# Altium PCB CuC_PCB.PcbDoc (part 4 of 4)
Units mm, origin at the board's own origin, x right, y up, seen from the top; angles counter-clockwise.
Board outline 203.71 x 204.22 mm, 2 copper layers (Top Layer, Bottom Layer); 421 components, 374 nets, 1366 pads, 155 vias.
Unrouted connection lines stored in the file: 2.
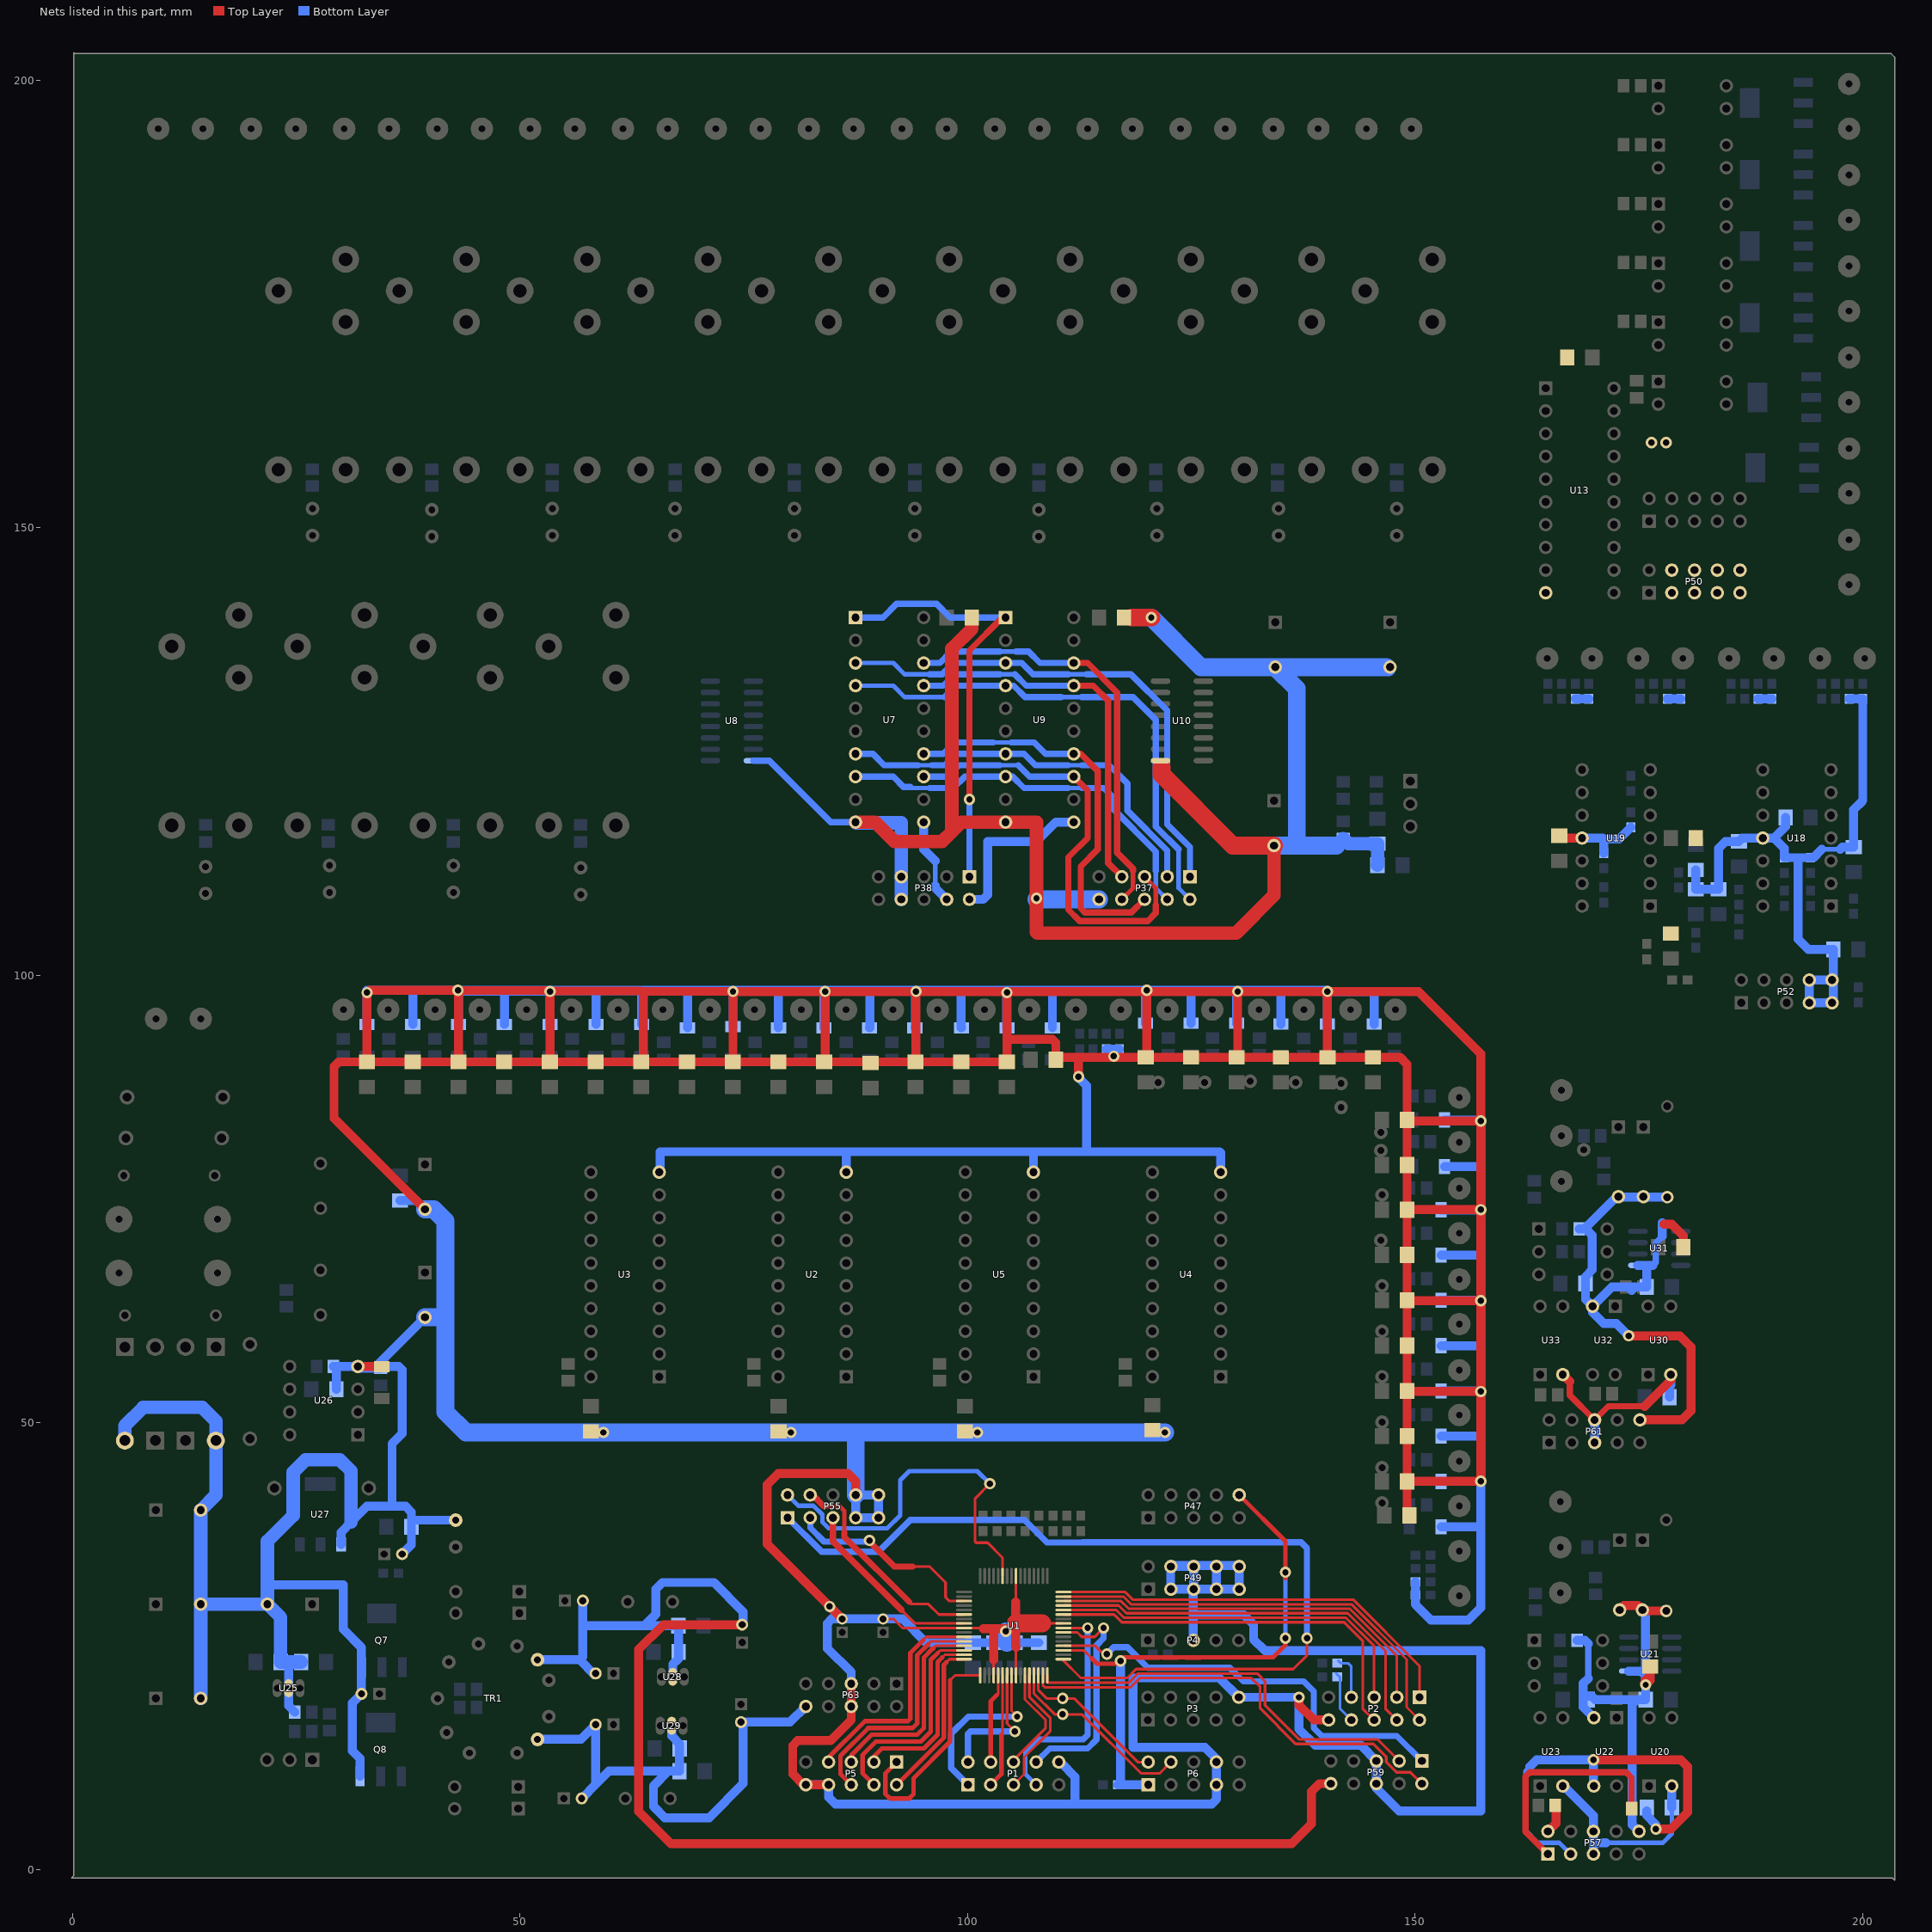
[diagram p4: the nets of this part, all layers, seen from the top]

## Via types
v1: diameter 1.27, hole 0.711, Top Layer to Bottom Layer, 155 vias

## Nets (pads, with @x,y where several pads share a name; then routed paths per layer and width w, separated by ;. In a path a pad name is that pad's centre, name@x,y a point inside that pad or via, vN(x,y) a via of type N, cw(c..) or ccw(c..) an arc to the next point about the centre after c; other vN are vias at no path point) (continued)
O1_CLK: P38.2 U9.11 | length 18.7
  Bottom Layer w1: P38.2@100.203,108.458 101.727,108.458 102.235,108.966 102.235,114.935 107.696,114.935 109.855,117.094 U9.11@111.86,117.094
O2_CLK: P38.4 U7.11 | length 9.7
  Bottom Layer w0.5: 96.393,109.982 96.393,112.776
  Bottom Layer w1: U7.11@95.096,117.094 95.096,114.073 96.393,112.776 ; 96.393,109.982 96.393,109.728 P38.4@97.663,108.458
O_DATA0: P37.1 U7.3 U9.3 | length 57.7
  Bottom Layer w0.5: U7.3@87.476,134.874 91.694,134.874 92.964,133.604 95.74,133.604 ; 111.215,133.604 113.284,133.604
  Bottom Layer w0.7: 95.74,133.604 97.155,133.604 98.425,134.874 U9.3@104.24,134.874 106.045,134.874 107.315,133.604 111.215,133.604 ; 113.284,133.604 118.254,133.604 122.301,129.557 122.301,116.84 124.841,114.3 P37.1@124.841,110.998
O_DATA1: P37.2 U7.4 U9.4 | length 57.8
  Bottom Layer w0.5: U7.4@87.476,132.334 91.694,132.334 92.964,131.064 97.409,131.064 ; 110.49,131.064 112.776,131.064 ; 123.571,114.046 123.571,109.728 P37.2@124.841,108.458
  Bottom Layer w0.7: 97.409,131.064 98.679,132.334 U9.4@104.24,132.334 105.156,132.334 106.426,131.064 110.49,131.064 ; 112.776,131.064 118.491,131.064 121.031,128.524 121.031,116.586 123.571,114.046
O_DATA2: P37.3 U7.7 U9.7 | length 45.1
  Bottom Layer w0.5: 94.451,123.444 96.012,123.444 ; 111.215,123.444 112.776,123.444
  Bottom Layer w0.7: U7.7@87.476,124.714 89.408,124.714 90.678,123.444 94.451,123.444 ; 96.012,123.444 97.409,123.444 98.679,124.714 U9.7@104.24,124.714 106.299,124.714 107.569,123.444 111.215,123.444 ; 112.776,123.444 115.824,123.444 117.856,121.412 117.856,118.364 122.301,113.919 P37.3@122.301,110.998
O_DATA3: P37.4 U7.8 U9.8 | length 44.7
  Bottom Layer w0.5: 93.599,121.031 93.726,120.904 95.74,120.904 ; 111.215,120.904 112.776,120.904 ; 121.031,111.643 121.031,109.728 P37.4@122.301,108.458
  Bottom Layer w0.7: U7.8@87.476,122.174 91.694,122.174 92.837,121.031 93.599,121.031 ; 95.74,120.904 98.425,120.904 99.695,122.174 U9.8@104.24,122.174 105.029,122.174 106.299,120.904 111.215,120.904 ; 112.776,120.904 115.189,120.904 116.267,119.826 116.267,118.556 121.031,113.792 121.031,111.643
O_DATA4: P37.5 U7.13 U9.13 | length 49.5
  Top Layer w0.5: P37.5@119.761,110.998 119.761,110.966 121.031,109.696 121.031,107.813
  Top Layer w0.7: U9.13@111.86,122.174 113.411,120.623 113.411,115.316 111.252,113.157 111.252,107.315 112.522,106.045 120.142,106.045 121.031,106.934 121.031,107.813
  Bottom Layer w0.5: 103.595,123.444 105.664,123.444
  Bottom Layer w0.7: U7.13@95.096,122.174 97.79,122.174 99.06,123.444 103.595,123.444 ; 105.664,123.444 106.934,122.174 U9.13@111.86,122.174
O_DATA5: P37.6 U7.14 U9.14 | length 45.4
  Top Layer w0.7: U9.14@111.86,124.714 112.649,124.714 114.554,122.809 114.554,114.046 112.649,112.141 112.649,107.442 113.092,106.999 118.302,106.999 P37.6@119.761,108.458
  Bottom Layer w0.5: 102.87,125.984 104.884,125.984
  Bottom Layer w0.7: U7.14@95.096,124.714 97.282,124.714 98.552,125.984 102.87,125.984 ; 104.884,125.984 107.442,125.984 108.712,124.714 U9.14@111.86,124.714
O_DATA6: P37.7 U7.17 U9.17 | length 42.7
  Top Layer w0.7: U9.17@111.86,132.334 114.046,132.334 115.697,130.683 115.697,112.522 P37.7@117.221,110.998
  Bottom Layer w0.5: 103.595,133.604 105.283,133.604
  Bottom Layer w0.7: U7.17@95.096,132.334 97.282,132.334 98.552,133.604 103.595,133.604 ; 105.283,133.604 106.553,132.334 U9.17@111.86,132.334
O_DATA7: P37.8 U7.18 U9.18 | length 48.4
  Top Layer w0.5: P37.8@117.221,108.458 118.491,109.728 118.491,111.643
  Top Layer w0.7: U9.18@111.86,134.874 113.411,134.874 116.713,131.572 116.713,113.665 118.491,111.887 118.491,111.643
  Bottom Layer w0.5: 103.595,136.144 105.41,136.144
  Bottom Layer w0.7: U7.18@95.096,134.874 96.901,134.874 98.171,136.144 103.595,136.144 ; 105.41,136.144 106.807,136.144 108.077,134.874 U9.18@111.86,134.874
O_ENABLE: P38.1 U7.1 U9.1 | length 48.9
  Top Layer w0.7: v1(100.203,119.634) 100.203,136.271 103.886,139.954 U9.1@104.24,139.954
  Bottom Layer w0.7: U7.1@87.476,139.954 90.551,139.954 92.075,141.478 96.52,141.478 98.044,139.954 U9.1@104.24,139.954 ; P38.1@100.203,110.998 v1(100.203,119.634)
OUTPUT1_CLK: P6.2 U1.30 | length 17.5
  Top Layer w0.3: U1.30@107.906,21.755 107.906,20.11 108.839,19.177 110.363,19.177 110.617,18.923 v1@110.744,18.923 ; v1(110.617,19.177) 111.887,19.177 118.999,12.065 P6.2@120.184,12.065
OUTPUT2_CLK: P6.4 U1.29 | length 21.7
  Top Layer w0.3: U1.29@107.406,21.755 107.406,19.721 109.728,17.399 110.363,17.399 v1@110.617,17.145 ; v1(110.617,17.399) 112.776,17.399 119.38,10.795 121.454,10.795 P6.4@122.724,12.065
OUTPUT_ENABLE: P6.1 P47.10 R6.1 U1.35 | length 64.1
  Top Layer w0.3: U1.35@110.706,24.555 112.96,24.555 113.842,23.672
  Top Layer w0.5: 113.842,23.672 114.47,23.045 116.771,23.045 117.497,23.771 118.899,23.771 118.916,23.754 121.368,23.754 121.377,23.763 121.886,23.763 121.895,23.754 123.469,23.754 123.478,23.763 124.426,23.763 124.435,23.754 126.009,23.754 126.026,23.771 134.134,23.771 135.509,25.146 v1(135.509,25.908) ; P47.10@130.344,41.91 135.509,36.745 135.509,32.639 v1(135.509,33.274)
  Bottom Layer w0.5: v1@135.509,25.654 v1(135.509,33.274)
  Bottom Layer w1: v1(117.094,23.368) 117.094,9.818 R6.1@116.801,9.525 P6.1@120.184,9.525
PWM0: P55.1 U1.33 | length 103.6
  Top Layer w0.3: U1.33@110.706,23.555 110.706,23.406 112.649,21.463 117.839,21.463 118.83,22.454 136.373,22.454 137.922,24.003 v1@137.922,25.654
  Bottom Layer w0.7: P55.1@79.883,39.37 83.693,35.56 90.043,35.56 93.599,39.116 106.352,39.116 108.862,36.606 112.845,36.606 112.849,36.61 137.253,36.61 137.922,35.941 v1@137.922,25.654
  other v1: 137.922,25.908
PWM1: P55.2 U1.59 | length 43.2
  Top Layer w0.3: v1@102.489,43.18 100.838,41.529 100.838,36.683 100.945,36.576 102.235,36.576 103.906,34.905 U1.59@103.906,32.855
  Bottom Layer w0.5: P55.2@79.883,41.91 81.083,40.71 82.78,40.71 83.763,39.727 83.763,38.873 84.466,38.17 91.002,38.17 92.456,39.624 92.456,43.561 93.472,44.577 101.084,44.577 v1(102.489,43.172)
PWM2: P55.3 U1.3 | length 23.3
  Top Layer w0.3: 93.853,33.909 95.758,33.909 97.536,32.131 97.536,30.48 97.961,30.055 U1.3@99.606,30.055
  Top Layer w0.7: v1(89.027,36.83) 88.9,36.83 91.821,33.909 93.853,33.909
  Bottom Layer w0.7: P55.3@82.423,39.37 82.423,38.227 83.947,36.703 88.773,36.703 88.773,36.957 88.9,36.83 v1(89.027,36.83)
PWM3: P55.4 U1.6 | length 24.4
  Top Layer w0.3: 93.472,29.972 93.726,29.718 95.631,29.718 96.794,28.555 U1.6@99.606,28.555
  Top Layer w0.5: 83.947,40.64 85.725,40.64 86.233,40.132 86.233,37.719
  Top Layer w0.7: P55.4@82.55,42.037 83.947,40.64 ; 86.233,37.719 86.233,37.211 93.472,29.972
PWM4: P55.5 U1.8 | length 21.1
  Top Layer w0.3: 92.583,29.083 94.111,27.555 U1.8@99.606,27.555
  Top Layer w0.7: P55.5@84.963,39.37 84.963,36.703 92.583,29.083
RA0: P1.1 U1.24 | length 19.5
  Top Layer w0.3: U1.24@104.906,21.755 104.906,17.776 v1(105.537,17.145)
  Bottom Layer w0.7: P1.1@100.034,9.525 98.171,11.388 98.171,15.24 100.076,17.145 v1(105.537,17.145)
RA1: P1.2 U1.23 | length 15.1
  Top Layer w0.3: U1.23@104.406,21.755 104.406,16.371 v1(105.283,15.494)
  Bottom Layer w0.7: P1.2@100.034,12.065 100.034,15.198 100.33,15.494 v1(105.283,15.494)
RA2: P1.3 U1.22 | length 12.7
  Top Layer w0.3: 103.906,15.098 U1.22@103.906,21.755
  Top Layer w0.5: P1.3@102.574,9.525 103.774,10.725 103.774,15.098
RA3: P1.4 U1.21 | length 10
  Top Layer w0.3: 103.251,19.558 103.406,19.713 U1.21@103.406,21.755
  Top Layer w0.5: P1.4@102.574,12.065 102.574,18.881 103.251,19.558
RA4: P1.5 U1.28 | length 14.9
  Top Layer w0.3: P1.5@105.114,9.525 106.299,10.71 106.299,12.573 109.22,15.494 109.22,17.018 106.906,19.332 U1.28@106.906,21.755
RA5: P1.6 U1.27 | length 12.1
  Top Layer w0.3: P1.6@105.114,12.065 105.114,12.277 108.72,15.883 108.72,16.756 106.406,19.07 U1.27@106.406,21.755
RA6: P1.7 U1.40 | length 26
  Top Layer w0.3: U1.40@110.706,27.055 112.772,27.055 v1@112.776,27.051
  Bottom Layer w0.5: P1.7@107.654,9.525 106.454,10.725 106.454,13.236 107.823,14.605
  Bottom Layer w0.7: 107.823,14.605 112.903,14.605 113.411,15.113 v1(113.411,27.051)
RA7: P1.8 U1.39 | length 25.7
  Top Layer w0.3: U1.39@110.706,26.555 112.256,26.555 112.756,26.055 114.193,26.055 v1(115.189,27.051)
  Bottom Layer w0.7: P1.8@107.654,12.065 109.178,13.589 113.411,13.589 114.385,14.563 114.385,25.104 115.189,25.908 v1(115.189,27.051)
RB0: P2.1 U1.48 | length 46.7
  Top Layer w0.3: U1.48@110.706,31.055 117.607,31.055 118.436,30.226 143.07,30.226 150.495,22.801 P2.1@150.495,19.304
RB1: P2.2 U1.47 | length 48.6
  Top Layer w0.3: U1.47@110.706,30.555 117.4,30.555 118.261,29.694 142.895,29.694 149.055,23.534 149.055,18.204 P2.2@150.495,16.764
RB2: P2.3 U1.46 | length 44.4
  Top Layer w0.3: U1.46@110.706,30.055 117.138,30.055 117.999,29.194 142.688,29.194 147.955,23.927 P2.3@147.955,19.304
RB3: P2.4 U1.45 | length 46.3
  Top Layer w0.3: U1.45@110.706,29.555 116.876,29.555 117.737,28.694 142.481,28.694 146.685,24.49 146.685,18.034 P2.4@147.955,16.764
RB4: P2.5 U1.44 | length 42.1
  Top Layer w0.3: U1.44@110.706,29.055 116.614,29.055 117.475,28.194 142.274,28.194 145.415,25.053 P2.5@145.415,19.304
RB5: P2.6 U1.43 | length 44
  Top Layer w0.3: U1.43@110.706,28.555 116.352,28.555 117.221,27.686 142.074,27.686 144.145,25.615 144.145,18.034 P2.6@145.415,16.764
RB6: P2.7 R1.1 | length 5.1
  Bottom Layer w0.3: R1.1@141.439,23.368 141.693,23.114 142.494,23.114 142.875,22.733 P2.7@142.875,19.304
RB7: P2.8 R2.1 | length 5.9
  Bottom Layer w0.3: R2.1@141.185,21.971 141.605,21.551 141.605,18.034 P2.8@142.875,16.764
RF1: P5.1 U1.17 | length 25.6
  Top Layer w0.3: 98.044,21.209 98.59,21.755 U1.17@101.406,21.755
  Top Layer w0.5: P5.1@92.075,12.065 90.805,10.795 90.805,8.509 91.313,8.001 93.472,8.001 93.948,8.477 93.948,10.255 98.044,14.351 98.044,21.209
RF2: P5.2 U1.16 | length 18.1
  Top Layer w0.3: 97.663,23.241 97.977,23.555 U1.16@99.606,23.555
  Top Layer w0.5: P5.2@92.075,9.525 97.344,14.794 97.344,22.922 97.663,23.241
RF3: P5.3 U1.15 | length 20.2
  Top Layer w0.3: 97.155,23.749 97.461,24.055 U1.15@99.606,24.055
  Top Layer w0.5: P5.3@89.535,12.065 89.535,12.7 90.424,13.589 95.123,13.589 96.644,15.11 96.644,23.212 96.647,23.215 96.647,23.241 97.155,23.749
RF4: P5.4 U1.14 | length 24.7
  Top Layer w0.3: 96.647,24.231 96.971,24.555 U1.14@99.606,24.555
  Top Layer w0.5: P5.4@89.535,9.525 88.265,10.795 88.265,12.853 89.763,14.351 94.768,14.351 95.885,15.468 95.885,23.469 96.647,24.231
RF5: P5.5 U1.13 | length 23.1
  Top Layer w0.3: 96.136,24.765 96.139,24.765 96.429,25.055 U1.13@99.606,25.055
  Top Layer w0.5: P5.5@86.995,12.065 86.995,12.827 89.281,15.113 94.361,15.113 95.123,15.875 95.123,23.752 96.136,24.765
RF6: P5.6 U1.12 | length 27.3
  Top Layer w0.3: 95.631,25.273 95.913,25.555 U1.12@99.606,25.555
  Top Layer w0.5: P5.6@86.995,9.525 85.795,10.725 85.795,12.77 88.9,15.875 93.853,15.875 94.361,16.383 94.361,24.003 95.631,25.273
RF7: P5.7 U1.11 | length 25.6
  Top Layer w0.3: 95.059,25.717 95.397,26.055 U1.11@99.606,26.055
  Top Layer w0.5: P5.7@84.455,12.065 84.455,12.573 88.519,16.637 93.345,16.637 93.599,16.891 93.599,24.257 95.059,25.717
RS485_DATA_DIR: P59.1 U1.36 | length 49.3
  Top Layer w0.3: U1.36@110.706,25.055 114.264,25.055 115.57,23.749 115.824,23.749 115.57,24.003 v1(115.57,24.13)
  Bottom Layer w0.7: v1(115.57,24.13) 116.332,24.892 117.856,24.892 120.142,22.606 129.286,22.606 130.81,21.082 137.541,21.082 138.684,19.939 138.684,15.875 139.573,14.986 147.955,14.986 P59.1@150.749,12.192
RS485_DATA_DIR2: P57.1 R112.2 | length 25.5
  Top Layer w0.7: P57.1@164.846,1.778 162.348,4.276 162.348,10.456 162.814,10.922 173.584,10.922 174.183,10.323 R112.2@174.183,6.858
RS485_RX: P59.3 U1.32 | length 46.1
  Top Layer w0.3: U1.32@108.906,21.755 108.906,20.955 118.038,20.955 119.037,21.954 132.351,21.954 133.223,21.082 133.223,18.415 137.033,14.605 145.796,14.605 P59.3@148.209,12.192
RS485_RX2: P57.3 R116.1 U22.3 | length 46.5
  Top Layer w1: v1(169.926,12.319) 179.68,12.319 180.454,11.544 180.454,6.464 178.562,4.572 v1(176.911,4.572)
  Bottom Layer w0.5: 162.814,11.557 162.306,11.049 162.306,4.445 163.703,3.048 166.116,3.048 P57.3@167.386,1.778
  Bottom Layer w1: 162.814,11.557 163.576,12.319 v1(169.926,12.319) U22.3@169.926,9.44 ; R116.1@175.895,6.604 175.895,6.096 176.911,5.08 v1(176.911,4.572)
RS485_TX: P59.2 U1.31 | length 50.6
  Top Layer w0.3: U1.31@108.406,21.755 108.406,20.626 108.628,20.404 118.194,20.404 119.244,21.454 131.708,21.454 132.684,20.478 132.684,18.065 136.652,14.097 145.32,14.097 146.769,12.648 146.769,12.076 147.923,10.922 149.479,10.922 P59.2@150.749,9.652
RS485_TX2: P57.2 R119.2 | length 3.1
  Top Layer w1: P57.2@164.846,4.318 165.735,5.207 R119.2@165.735,7.051
VSS: C1.2 C2.2 C3.2 C4.2 C5.2 C6.2 C7.2 C8.2 C9.2 C10.2 C11.2 C12.2 C13.2 C14.2 C15.2 C16.2 C17.2 C18.2 C19.2 C20.2 C21.2 C22.2 C23.2 C24.2 C25.2 C26.2 C27.2 C28.2 C29.2 C30.2 C31.2 C32.2 C33.2 C34.2 C35.2 C36.2 C37.2 C38.2 C39.2 C40.2 C41.2 C42.2 C62.2 C63.2 C64.2 C65.2 C66.1 C69.1 C70.1 C71.2 C72.1 C73.2 C74.1 C75.2 C76.1 C77.2 D1.1 D2.1 D3.1 D4.1 D5.1 D6.1 D7.1 D8.1 D9.1 D10.1 D11.1 D12.1 D13.1 D14.1 D15.1 D16.1 D17.1 D18.1 D19.1 D20.1 D21.1 D22.1 D23.1 D24.1 D25.1 D26.1 D27.1 D28.1 D29.1 D30.1 D31.1 D32.1 D50.1 D52.1 D53.1 D54.1 P1.10 P2.10 P3.10 P4.3 P5.8 P5.10 P6.7 P6.8 P49.3 P49.4 P49.5 P49.6 P49.7 P49.8 P49.9 P49.10 P55.7 P55.8 P55.9 P55.10 P59.5 P59.6 P63.5 P63.6 Q7.3 Q8.3 R35.1 R36.1 R37.1 R38.1 R128.1 R133.1 U1.9 U1.20 U1.25 U1.41 U1.56 U2.10 U3.10 U4.10 U5.10 U25.2 U26.4 U27.1 | length 1609.6
  Top Layer w0.3: C1.2@90.551,28.055 91.706,28.055 92.706,27.055 U1.9@99.606,27.055 101.676,27.055 101.767,26.964 ; U1.20@102.906,21.755 102.906,23.491 102.91,23.495 ; 104.779,27.055 105.279,27.555 105.366,27.555 ; 105.279,29.845 105.366,29.932 105.406,29.972 U1.56@105.406,32.855 ; U1.25@105.406,21.755 105.406,24.892 ; 108.327,27.555 U1.41@110.706,27.555
  Top Layer w1: U26.4@31.877,56.261 34.541,56.261 D53.1@34.544,56.258 ; C71.2@39.37,73.827 29.21,83.987 29.21,89.789 29.721,90.3 C17.2@32.893,90.3 ; v1@43.107,98.117 C19.2@43.107,90.3 ; v1(53.34,98.171) 53.34,90.318 C21.2@53.322,90.3 ; 63.59,98.134 63.754,98.171 C23.2@63.754,90.518 ; C16.2@73.787,90.336 v1(73.787,98.171) ; C14.2@84.074,90.409 v1(84.074,98.171) ; P5.8@84.455,9.525 P5.10@81.915,9.525 81.661,9.525 80.465,10.721 80.465,13.917 81.026,14.478 84.709,14.478 86.995,16.764 P63.6@86.995,18.288 P63.5@86.995,20.828 ; C2.2@85.979,28.055 77.597,36.437 77.597,43.053 78.867,44.323 86.614,44.323 87.503,43.434 P55.8@87.503,41.91 ; C12.2@94.234,90.354 v1(94.234,98.171) ; 101.767,26.964 102.91,26.964 ; 102.91,23.495 102.91,26.964 ; v1(104.394,98.044) 104.394,92.837 ; 105.279,27.051 105.366,26.964 ; 105.366,29.932 105.366,27.555 105.366,26.964 ; 105.406,24.892 105.366,24.932 105.366,26.964 ; v1(112.395,88.646) 112.395,90.678 112.268,90.805 ; C35.2@120.015,90.935 v1@120.015,98.171 ; v1(120.015,98.298) v1@120.015,98.171 ; C37.2@130.175,90.935 v1(130.175,98.171) ; v1(137.033,19.304) 137.033,18.415 138.684,16.764 P2.10@140.335,16.764 ; C39.2@140.208,90.808 v1(140.208,98.171) ; C27.2@149.101,39.497 C28.2@149.101,43.416 C29.2@149.101,48.478 C30.2@149.101,53.54 C31.2@149.101,58.601 C32.2@149.101,63.663 C33.2@149.101,68.725 C34.2@149.101,73.787 ; C28.2@149.119,43.434 v1(157.353,43.434) v1(157.353,53.467) ; C32.2@149.137,63.627 v1(157.353,63.627) ; C30.2@149.174,53.467 v1(157.353,53.467) ; C41.2@149.228,83.693 v1(157.353,83.693) ; C17.2@32.893,90.3 v1(32.893,98.044) 33.147,98.298 v1(43.053,98.298) 53.34,98.255 v1(73.787,98.171) ; C17.2@32.893,90.3 C18.2@38,90.3 C19.2@43.107,90.3 ; C19.2@43.107,90.3 C20.2@48.215,90.3 C21.2@53.322,90.3 ; C21.2@53.322,90.3 C22.2@58.429,90.3 C23.2@63.536,90.3 C24.2@68.644,90.3 C16.2@73.751,90.3 C15.2@78.858,90.3 C14.2@83.965,90.3 C12.2@94.18,90.3 C11.2@99.287,90.3 C10.2@104.394,90.3 104.394,92.837 ; v1(73.787,98.171) v1(84.074,98.171) ; v1(84.074,98.171) v1(94.234,98.171) ; v1(94.234,98.171) v1@120.015,98.171 ; 102.91,26.964 105.366,26.964 ; 104.394,92.837 109.474,92.837 109.858,92.453 C9.2@109.858,90.551 110.112,90.805 112.268,90.805 ; 112.268,90.805 148.336,90.805 149.101,90.04 C41.2@149.101,83.82 C42.2@149.101,78.768 C34.2@149.101,73.787 ; v1@120.015,98.171 v1(130.175,98.171) ; v1(130.175,98.171) v1(140.208,98.171) ; v1(140.208,98.171) 150.368,98.171 157.353,91.186 v1(157.353,83.693) ; C34.2@149.101,73.787 v1(157.353,73.787) ; v1(157.353,53.467) v1(157.353,63.627) ; v1(157.353,63.627) v1(157.353,73.787) ; v1(157.353,73.787) v1(157.353,83.693)
  Top Layer w2: 105.366,27.555 108.327,27.555 108.331,27.559
  Bottom Layer w1: 21.757,32.004 21.884,31.877 30.226,31.877 30.226,26.924 32.274,24.876 Q7.3@32.274,22.624 ; 24.257,23.241 24.13,23.114 U25.2@24.13,20.32 24.13,18.354 R128.1@24.831,17.653 ; R133.1@29.144,56.261 U26.4@31.877,56.261 ; C70.1@29.467,53.721 R133.1@29.467,55.938 ; U27.1@29.986,36.376 29.986,37.733 31.115,38.862 32.893,40.64 35.687,40.64 ; Q8.3@32.117,10.462 32.117,12.46 31.242,13.335 31.242,18.653 C77.2@32.274,19.685 Q7.3@32.274,22.624 ; Q7.3@32.244,22.654 Q7.3@32.274,22.624 ; D1.1@32.885,94.485 32.885,98.29 33.011,98.179 v1@33.02,98.171 ; v1(32.893,98.044) v1@33.02,98.171 ; C74.1@34.417,56.068 32.07,56.068 U26.4@31.877,56.261 ; C72.1@36.576,74.8 38.397,74.8 C71.2@39.37,73.827 ; C75.2@36.814,35.306 37.849,36.341 C76.1@37.849,38.354 C76.1@37.849,39.116 ; D2.1@38.002,94.485 38.002,98.142 ; C73.2@39.37,61.762 C74.1@33.869,56.261 ; D54.1@42.799,39.092 37.873,39.092 C76.1@37.849,39.116 ; v1@43.107,98.117 v1@43.053,98.171 ; D3.1@43.12,94.485 43.12,98.111 v1@43.053,98.171 ; D4.1@48.237,94.485 48.237,98.181 ; 48.237,98.275 48.237,98.181 ; v1(53.34,98.171) 53.355,98.186 D5.1@53.355,94.485 ; D6.1@58.472,94.485 58.472,98.096 ; D7.1@63.59,94.485 63.59,98.134 ; U3.10@65.532,77.978 65.659,78.105 65.659,80.264 113.284,80.264 ; D8.1@68.697,94.104 68.697,98.161 ; D16.1@73.787,94.231 v1(73.787,98.171) ; D15.1@78.867,94.104 78.867,98.171 ; P5.10@81.915,9.525 P5.8@84.455,9.525 84.455,8.128 85.217,7.366 127.254,7.366 127.804,7.916 P6.7@127.804,9.525 P6.8@127.804,12.065 127.762,12.107 127.762,12.446 126.492,13.716 118.491,13.716 118.491,21.463 128.143,21.463 P3.10@130.302,19.304 v1(137.033,19.304) 137.033,15.748 138.845,13.936 143.925,13.936 P59.5@145.669,12.192 P59.6@145.669,9.652 145.669,9.144 148.209,6.604 157.353,6.604 157.353,24.511 133.223,24.511 131.953,25.781 131.953,27.432 130.895,28.49 125.222,28.49 ; D14.1@83.947,94.104 v1@83.947,98.249 ; v1@84.582,29.464 v1(84.582,29.452) C2.2@85.979,28.055 ; U2.10@86.445,77.978 86.445,80.179 ; P63.6@86.995,18.288 P63.5@86.995,20.828 86.995,22.098 84.328,24.765 84.328,27.559 84.824,28.055 C2.2@85.979,28.055 ; P55.8@87.503,41.91 P55.7@87.503,39.37 P55.9@90.043,39.37 P55.10@90.043,41.91 P55.8@87.757,41.91 ; D13.1@89.027,94.104 89.085,94.104 89.085,98.24 ; D12.1@94.107,94.104 94.183,94.104 v1@94.183,98.247 ; 99.28,98.205 99.28,94.104 D11.1@99.314,94.104 ; v1@104.377,98.281 104.377,94.104 D10.1@104.394,94.104 ; U5.10@107.357,77.978 107.357,80.101 ; C3.2@107.95,25.403 C4.2@105.283,25.403 104.394,25.403 C5.2@102.997,25.403 C6.2@100.584,25.403 95.374,25.403 92.722,28.055 C1.2@90.551,28.055 C2.2@85.979,28.055 ; D9.1@109.474,94.104 109.474,98.298 ; P1.10@110.49,11.938 112.014,10.414 112.014,7.366 ; v1@112.331,88.582 113.284,87.63 113.284,80.264 ; R35.1@115.485,91.733 R36.1@116.967,91.733 ; D17.1@119.888,94.612 v1@119.888,98.171 ; P49.4@122.724,33.909 P49.6@125.264,33.909 P49.5@125.264,31.369 ; D18.1@124.968,94.612 124.968,98.298 ; P4.3@125.222,25.654 125.222,28.49 ; P49.8@127.804,33.909 P49.7@127.804,31.369 ; U4.10@128.27,77.978 128.27,80.137 128.143,80.264 113.284,80.264 ; D19.1@130.048,94.612 v1@130.048,98.298 ; D20.1@135.001,94.523 135.001,98.298 ; D21.1@140.208,94.523 v1(140.208,98.171) ; D22.1@145.415,94.523 145.415,98.171 v1(140.208,98.171) ; R37.1@150.026,32.216 R38.1@150.026,30.734 150.026,29.679 151.765,27.94 155.956,27.94 157.353,29.337 157.353,38.354 ; D25.1@152.905,38.354 157.353,38.354 ; D26.1@152.905,43.413 v1@157.332,43.413 ; D27.1@152.905,48.473 157.267,48.473 ; D28.1@152.905,53.532 v1@157.288,53.532 ; D29.1@152.905,58.592 157.181,58.592 ; D30.1@152.905,63.651 v1@157.329,63.651 ; D31.1@152.905,68.711 157.349,68.711 ; D32.1@152.905,73.77 v1@157.336,73.77 ; D24.1@153.286,78.613 157.226,78.613 ; D23.1@153.286,83.82 v1@157.226,83.82 ; v1(157.353,83.693) v1(157.353,73.787) v1(157.353,63.627) v1(157.353,53.467) v1(157.353,43.434) 157.353,38.354 ; U26.4@31.877,56.261 C74.1@33.869,56.261 ; v1@33.02,98.171 32.893,98.298 v1(43.053,98.298) 109.474,98.298 ; C74.1@33.869,56.261 36.449,56.261 36.83,55.88 36.83,48.768 35.687,47.625 35.687,40.64 ; 35.687,40.64 37.211,40.64 37.849,40.002 C76.1@37.849,39.116 ; v1@43.053,98.171 48.237,98.181 ; 48.237,98.181 53.34,98.191 73.787,98.23 v1@83.947,98.249 ; v1@83.947,98.249 84.074,98.249 94.234,98.269 104.394,98.288 109.474,98.298 ; 109.474,98.298 v1(120.015,98.298) 124.968,98.298 ; 124.968,98.298 v1@130.048,98.298 ; 125.222,28.49 125.222,31.327 P49.5@125.264,31.369 ; P49.5@125.264,31.369 P49.7@127.804,31.369 ; P49.5@125.264,31.369 P49.3@122.724,31.369 122.682,31.411 122.682,34.036 130.217,34.036 P49.10@130.344,33.909 P49.9@130.344,31.369 P49.7@127.804,31.369 ; v1@130.048,98.298 135.001,98.298 ; 135.001,98.298 140.208,98.298 v1(140.208,98.171)
  Bottom Layer w1.5: D52.1@5.842,47.983 5.842,49.657 7.874,51.689 14.478,51.689 16.002,50.165 D50.1@16.002,47.983 16.002,41.899 C62.2@14.311,40.208 C63.2@14.311,29.718 ; C64.2@14.311,19.177 C63.2@14.311,29.718 ; C69.1@25.524,23.241 24.257,23.241 C66.1@23.244,23.241 23.244,28.231 C65.2@21.757,29.718 ; 31.115,38.862 31.115,44.577 29.845,45.847 26.035,45.847 24.638,44.45 24.638,39.624 21.757,36.743 21.757,32.004 C65.2@21.757,29.718 ; C63.2@14.311,29.718 C65.2@21.757,29.718
  Bottom Layer w2: C73.2@39.37,61.762 41.656,61.762 ; C71.2@39.37,73.827 40.346,73.827 41.656,72.517 41.656,61.762 ; P55.8@87.503,41.91 87.503,48.768 87.63,48.895 ; v1(104.267,26.67) 104.267,25.53 C4.2@104.394,25.403 ; v1(122.047,48.895) v1(101.092,48.895) 87.63,48.895 ; 41.656,61.762 41.656,51.181 43.942,48.895 v1(59.309,48.895) v1(80.264,48.895) 87.63,48.895
  other v1: 116.332,90.932
VSS_AN: C51.1 C52.1 C53.1 C54.1 C55.2 C56.1 C57.1 C58.2 C59.1 C60.1 P52.7 P52.8 P52.9 P52.10 R85.1 R86.1 R87.1 R93.1 R94.1 R95.1 R101.1 R102.1 R103.1 R109.1 R110.1 R111.1 U18.11 U19.11 | length 90.3
  Top Layer w1: C59.1@166.116,115.573 166.373,115.316 U19.11@168.656,115.316
  Bottom Layer w0.5: 195.453,114.046 197.485,114.046
  Bottom Layer w1: R110.1@167.894,130.849 R111.1@169.418,130.849 ; U19.11@168.656,115.316 170.942,115.316 171.069,115.189 ; R109.1@171.069,113.626 171.069,115.189 ; R101.1@174.117,116.498 172.808,115.189 171.069,115.189 ; R102.1@178.181,130.849 R103.1@179.705,130.849 ; C56.1@181.356,111.757 C57.1@181.356,109.604 C54.1@183.896,109.604 183.896,114.173 184.661,114.938 C53.1@186.182,114.938 186.56,115.316 U18.11@188.849,115.316 190.119,115.316 ; R94.1@188.341,130.849 R95.1@189.865,130.849 ; C55.2@191.386,117.602 191.386,116.583 190.119,115.316 ; 195.453,114.046 194.525,113.118 R85.1@194.183,113.118 192.786,113.118 ; 197.485,114.046 197.742,114.303 C51.1@199.009,114.303 199.009,118.491 200.025,119.507 R87.1@200.025,130.849 R86.1@198.501,130.849 ; 190.119,115.316 191.262,114.173 R93.1@191.262,113.118 192.786,113.118 ; 192.786,113.118 192.786,104.013 193.929,102.87 C52.1@196.72,102.87 P52.10@196.72,99.441 ; P52.10@196.72,99.441 P52.10@196.596,99.441 P52.8@194.056,99.441 P52.7@194.056,96.901 P52.9@196.596,96.901 196.72,97.025 P52.10@196.72,99.441
VSS_CL: C83.1 C84.1 C85.2 C86.2 C87.2 P63.10 TR1.10 U29.2 | length 62.9
  Bottom Layer w1: TR1.10@51.943,14.605 56.785,14.605 C85.2@58.436,16.256 58.436,9.557 ; C87.2@56.88,8.001 58.436,9.557 ; U29.2@66.929,16.129 66.929,14.986 67.821,14.094 C84.1@67.821,13.589 67.821,11.055 C83.1@67.815,11.049 66.548,11.049 ; P63.10@81.915,18.288 80.153,16.526 74.93,16.526 74.93,9.652 71.12,5.842 66.167,5.842 64.897,7.112 64.897,9.398 66.548,11.049 ; 58.436,9.557 59.928,11.049 66.548,11.049
VSS_CL2: C88.1 D59.1 D60.1 P61.10 R137.1 R142.1 R144.1 R147.1 U31.5 U32.2 | length 68.7
  Top Layer w1: v1(173.863,59.69) 179.578,59.69 180.848,58.42 180.848,51.308 179.832,50.292 P61.10@175.133,50.292 ; 177.787,72.161 178.664,72.161 179.962,70.863 C88.1@179.962,69.596
  Bottom Layer w0.7: 176.581,67.564 176.892,67.875 176.892,70.085 177.609,70.802
  Bottom Layer w1: R147.1@168.336,71.628 R147.1@168.91,71.628 ; v1(173.863,59.69) 172.466,61.087 171.069,61.087 169.82,62.336 U32.2@169.82,62.992 ; 174.193,64.77 174.574,65.151 ; U31.5@174.892,67.564 U31.5@175.895,67.564 ; 176.581,67.564 U31.5@175.895,67.564 ; 177.609,70.802 177.609,72.339 177.787,72.161 ; R142.1@178.181,75.184 172.466,75.184 R147.1@168.91,71.628 ; R147.1@168.91,71.628 169.088,71.628 169.799,70.917 169.799,67.056 169.04,66.297 R144.1@169.04,65.532 169.04,63.771 U32.2@169.82,62.992 ; U32.2@169.82,62.992 171.979,65.151 174.574,65.151 ; 174.574,65.151 R137.1@175.892,65.151 175.892,66.167 175.895,66.17 U31.5@175.895,67.564
VSS_COM: C78.1 C79.1 C80.2 C81.2 C82.2 P59.10 TR1.7 U28.2 | length 162.5
  Top Layer w1: C81.2@74.803,27.416 66.024,27.416 63.259,24.651 63.259,6.545 66.862,2.942 136.211,2.942 138.43,5.161 138.43,8.763 139.319,9.652 P59.10@140.589,9.652
  Bottom Layer w1: TR1.7@51.943,23.495 56.658,23.495 ; C82.2@57.007,30.099 57.007,27.432 ; C80.2@58.309,21.844 56.658,23.495 ; U28.2@67.056,21.59 67.056,22.987 67.694,23.625 C79.1@67.694,24.384 67.688,24.39 C78.1@67.688,27.305 63.881,27.305 ; C81.2@74.93,27.416 74.93,28.829 71.628,32.131 65.913,32.131 65.151,31.369 65.151,28.575 63.881,27.305 ; 56.658,23.495 57.007,23.844 57.007,27.432 ; 57.007,27.432 57.134,27.305 63.881,27.305
VSS_CTRL: P61.5 P61.6 R140.2 U30.2 U33.2 | length 22.7
  Top Layer w0.7: 167.284,54.585 167.284,53.061 P61.6@170.053,50.292 171.577,51.816 175.641,51.816
  Top Layer w1: U33.2@166.497,55.372 167.284,54.585 ; 175.641,51.816 178.562,54.737 U30.2@178.562,55.372
  Bottom Layer w1: P61.5@170.053,47.752 P61.6@170.053,50.292 ; R140.2@178.438,52.832 178.438,54.08 178.562,54.204 U30.2@178.562,55.372
VSS_DO: C50.2 P50.3 P50.4 P50.5 P50.6 P50.7 P50.8 P50.9 P50.10 U13.10
  other v1: 176.403,159.487 178.054,159.487
VSS_O: C43.2 C44.1 C45.1 C46.2 C47.2 C48.2 C49.2 P37.10 P38.7 P38.8 R59.2 U7.10 U8.8 U9.10 U10.8 | length 211.2
  Top Layer w1.5: U7.10@87.476,117.094 89.662,117.094 91.821,114.935 97.155,114.935 98.234,116.014 ; C49.2@100.46,139.954 100.46,138.687 98.234,136.462 98.234,116.014 ; C43.2@134.239,114.467 134.239,108.925 130.005,104.691 107.78,104.691 107.696,104.775 107.696,117.094 U9.10@104.24,117.094 99.314,117.094 98.234,116.014
  Top Layer w2: 118.364,139.954 v1(120.523,139.954) ; 121.666,123.19 121.666,122.428 129.627,114.467 C43.2@134.239,114.467
  Bottom Layer w0.7: U8.8@76.06,123.957 77.846,123.957 84.709,117.094 U7.10@87.476,117.094
  Bottom Layer w1.5: U7.10@87.476,117.094 87.56,117.01 92.583,117.01 P38.7@92.583,110.998 P38.8@92.583,108.458 ; 141.198,114.467 R59.2@141.986,115.255 142.563,114.678 C45.1@145.796,114.678 145.796,112.271 C44.1@145.793,112.268 ; C46.2@146.812,134.406 C46.2@147.066,134.152
  Bottom Layer w2: v1@107.696,108.458 P37.10@114.681,108.458 ; v1(120.523,139.954) 126.071,134.406 C47.2@134.366,134.406 ; C43.2@134.239,114.467 136.779,114.467 ; 141.198,114.467 136.779,114.467 ; C46.2@146.812,134.406 C47.2@134.366,134.406 ; C47.2@134.366,134.406 136.779,131.993 136.779,114.467
  other v1: 107.696,108.585
VSS_RS: P57.5 P57.6 R116.2 U20.2 U23.2 | length 23.5
  Bottom Layer w0.5: 171.323,3.048 177.673,3.048 178.689,4.064 R116.2@178.689,6.985
  Bottom Layer w1: U23.2@166.497,9.398 166.599,9.398 169.926,6.071 ; P57.5@169.926,1.778 169.926,3.048 ; 169.926,5.969 P57.6@169.926,4.318 169.926,3.048 ; 171.323,3.048 169.926,3.048 ; U20.2@178.689,9.398 178.689,6.985 R116.2@178.692,6.985
VSS_RS2: C61.1 D47.1 D48.1 P57.10 R113.1 R118.1 R120.1 R123.1 U21.5 U22.2 | length 56.7
  Top Layer w1: D48.1@172.847,29.059 173.334,29.546 174.9,29.546 D47.1@175.387,29.059 175.387,28.956 R118.1@178.054,28.956 ; v1@175.717,21.209 176.276,21.768 ; v1(175.765,20.701) 175.765,20.767 175.641,20.892 175.958,20.892 176.276,21.209 176.276,21.768 ; C61.1@176.276,22.73 176.276,21.768
  Bottom Layer w0.7: 169.342,21.409 169.342,25.286
  Bottom Layer w1: R123.1@168.082,25.654 168.974,25.654 169.342,25.286 ; 169.342,21.409 168.786,20.853 R120.1@168.786,19.431 ; U22.2@169.968,17.018 168.786,18.2 R120.1@168.786,19.431 ; U21.5@173.876,22.225 175.209,22.225 ; P57.10@175.006,4.318 174.244,5.08 174.244,18.491 174.803,19.05 ; D47.1@175.387,29.059 175.743,29.059 175.743,21.806 ; v1@175.717,21.209 175.717,21.717 175.209,22.225 ; v1(175.765,20.701) 175.765,20.767 175.641,20.892 175.743,20.993 175.743,21.806 ; R120.1@168.786,19.431 169.723,19.431 170.104,19.05 174.803,19.05 ; 174.803,19.05 R113.1@175.765,19.05 175.765,21.783 175.743,21.806 ; 175.209,22.225 175.323,22.225 175.743,21.806
pads on no net: K1.5 K2.5 K3.5 K4.5 K5.5 K6.5 K7.5 K8.5 K9.5 K10.5 K11.5 K12.5 K13.5 K14.5 P6.3 P6.5 P6.6 P38.3 P38.5 P38.6 P57.7 P57.8 P59.7 P59.8 P61.7 P61.8 P63.7 P63.8 U7.19 U9.19 U13.16 U13.19

## Polygon pours and split planes (outlines as drawn)
VSS_AN on Top Layer "Bottom Layer-No Net" (hatched 90Degree grid 0.508 track 0.203, remove dead copper, pour order 8): 162.259,139.509 202.739,139.509 202.739,94.916 202.692,94.869 162.179,94.869 162.179,139.429 162.259,139.509
VSS_DO on Top Layer "Bottom Layer-No Net" (hatched 90Degree grid 0.508 track 0.203, remove dead copper, pour order 5): 161.671,201.911 161.798,202.032 181.102,202.032 181.102,162.953 190.119,154.363 191.135,153.396 191.135,140.934 161.544,140.934 161.544,202.032
VSS_AN on Bottom Layer "Bottom Layer-No Net" (hatched 90Degree grid 0.508 track 0.203, remove dead copper, pour order 6): 162.179,139.429 162.259,139.509 202.739,139.509 202.739,94.916 202.692,94.869 162.179,94.869 162.179,139.429 162.259,139.509
VSS_DO on Bottom Layer "Bottom Layer-No Net" (hatched 90Degree grid 0.508 track 0.203, remove dead copper, pour order 7): 161.544,202.159 181.102,202.159 180.975,202.037 180.975,161.544 185.039,157.665 185.039,155.119 191.262,149.178 191.262,141.055 191.135,140.934 161.671,140.934 161.544,141.055 161.544,202.159

## Keep-outs
Keep-Out Layer:
  circle w0.254: c172.244,98.679 r2
  circle w0.254: c181.007,127 r2
  circle w0.254: c181.673,158.079 r2
  circle w0.254: c165.587,198.211 r2
  lines w0.254: 162.179,139.429 162.179,94.869 202.692,94.869 ; 162.259,139.509 202.739,139.509 202.739,94.916 ; 161.544,140.945 202.819,140.945 202.819,202.159 161.544,202.159 161.544,140.945 ; 161.671,0.127 161.671,43.688 182.118,43.688 182.118,0.127 161.671,0.127 ; 161.798,46.228 182.245,46.228 182.245,89.789 161.798,89.789 161.798,46.228

## Silkscreen, mask and mechanical layers (free items; w line width, h text height)
Top Overlay:
  circle w0.254: c5.821,4.445 r2
  circle w0.254: c74.327,69.215 r2
  circle w0.254: c65.564,41.021 r2
  circle w0.254: c172.244,98.679 r2
  circle w0.254: c181.007,127 r2
  circle w0.254: c109.58,86.879 r2
  circle w0.254: c181.673,158.079 r2
  circle w0.254: c125.762,46.609 r2
  circle w0.254: c3.842,108.458 r2
  circle w0.254: c156.242,108.458 r2
  circle w0.254: c156.242,194.31 r2
  circle w0.254: c3.842,194.31 r2
  circle w0.254: c165.587,198.211 r2
  lines w0.254: 0,0 160,0 160,100 0,100 0,0 ; 0,102.997 0,202.997 160,202.997 160,102.997 0,102.997 ; 161.544,140.934 161.544,202.159 202.819,202.159 202.819,140.934 161.544,140.934 ; 161.671,0.127 182.118,0.127 182.118,43.688 161.671,43.688 161.671,0.127 ; 161.798,46.228 182.245,46.228 182.245,89.789 161.798,89.789 161.798,46.228 ; 162.179,94.869 162.179,139.429 162.259,139.509 202.739,139.509 202.739,94.916 202.692,94.869 162.179,94.869

## Dimensions
160,102.997 to 160,202.997 on Mechanical 1
0,202.997 to 160.147,200.914 on Mechanical 1
161.544,202.159 to 202.819,202.159 on Mechanical 1
182.245,89.789 to 182.245,46.228 on Mechanical 1
161.671,0.127 to 182.118,0.127 on Mechanical 1
0,0 to 160,0 on Mechanical 1
202.565,140.716 to 202.819,202.159 on Mechanical 1
198.247,95.123 to 202.739,139.509 on Mechanical 1
160,0 to 160,100 on Mechanical 1
160,0 to 182.118,43.688 on Mechanical 1

## Text inside footprints (layer, text, board x,y; h text height)
C1: Top Overlay "+" at 91.301,23.83 h1.5 r90
C2: Top Overlay "+" at 86.729,23.83 h1.5 r90
C43: Top Overlay "+" at 133.489,123.442 h1.5 r270
C46: Top Overlay "+" at 146.443,143.381 h1.5 r270
C47: Top Overlay "+" at 133.616,143.381 h1.5 r270
C62: Top Overlay "+" at 5.336,39.458 h1.5
C63: Top Overlay "+" at 5.336,28.968 h1.5
C64: Top Overlay "+" at 5.336,18.427 h1.5
C65: Top Overlay "+" at 30.732,30.468 h1.5 r180
C71: Top Overlay "+" at 38.62,82.802 h1.5 r270
C73: Top Overlay "+" at 38.62,70.737 h1.5 r270
C75: Top Overlay "+" at 31.839,34.556 h1.5
C77: Top Overlay "+" at 37.249,20.435 h1.5 r180
C80: Top Overlay "+" at 63.411,22.721 h1.5 r180
C81: Top Overlay "+" at 75.553,22.441 h1.5 r90
C82: Top Overlay "+" at 52.032,29.349 h1.5
C85: Top Overlay "+" at 63.411,17.006 h1.5 r180
C86: Top Overlay "+" at 73.926,21.501 h1.5 r270
C87: Top Overlay "+" at 51.905,7.251 h1.5
P1: Top Overlay "10" at 111.887,11.557 h1.27; Top Overlay "9" at 111.718,9.017 h1.27; Top Overlay "1" at 98.002,9.017 h1.27; Top Overlay "2" at 97.494,11.557 h1.27
P2: Top Overlay "10" at 138.811,17.272 h1.27 r180; Top Overlay "9" at 138.811,19.812 h1.27 r180; Top Overlay "1" at 152.527,19.812 h1.27 r180; Top Overlay "2" at 153.035,17.272 h1.27 r180
P3: Top Overlay "10" at 131.826,18.796 h1.27; Top Overlay "9" at 131.826,16.256 h1.27; Top Overlay "1" at 118.11,16.256 h1.27; Top Overlay "2" at 117.602,18.796 h1.27
P5: Top Overlay "10" at 80.391,10.033 h1.27 r180; Top Overlay "9" at 80.391,12.573 h1.27 r180; Top Overlay "1" at 94.107,12.573 h1.27 r180; Top Overlay "2" at 94.615,10.033 h1.27 r180
P6: Top Overlay "10" at 131.868,11.557 h1.27; Top Overlay "9" at 131.868,9.017 h1.27; Top Overlay "1" at 118.152,9.017 h1.27; Top Overlay "2" at 117.644,11.557 h1.27
P37: Top Overlay "10" at 113.157,108.966 h1.27 r180; Top Overlay "9" at 113.157,111.506 h1.27 r180; Top Overlay "1" at 126.873,111.506 h1.27 r180; Top Overlay "2" at 127.381,108.966 h1.27 r180
P38: Top Overlay "10" at 88.519,108.966 h1.27 r180; Top Overlay "9" at 88.519,111.506 h1.27 r180; Top Overlay "1" at 102.235,111.506 h1.27 r180; Top Overlay "2" at 102.743,108.966 h1.27 r180
P45: Top Overlay "10" at 187.833,152.745 h1.27; Top Overlay "9" at 187.833,150.205 h1.27; Top Overlay "1" at 174.117,150.205 h1.27; Top Overlay "2" at 173.609,152.745 h1.27
P47: Top Overlay "10" at 131.868,41.402 h1.27; Top Overlay "9" at 131.868,38.862 h1.27; Top Overlay "1" at 118.152,38.862 h1.27; Top Overlay "2" at 117.644,41.402 h1.27
P49: Top Overlay "10" at 131.868,33.401 h1.27; Top Overlay "9" at 131.868,30.861 h1.27; Top Overlay "1" at 118.152,30.861 h1.27; Top Overlay "2" at 117.644,33.401 h1.27
P50: Top Overlay "10" at 187.833,144.744 h1.27; Top Overlay "9" at 187.833,142.204 h1.27; Top Overlay "1" at 174.117,142.204 h1.27; Top Overlay "2" at 173.609,144.744 h1.27
P52: Top Overlay "10" at 198.12,98.933 h1.27; Top Overlay "9" at 198.12,96.393 h1.27; Top Overlay "1" at 184.404,96.393 h1.27; Top Overlay "2" at 183.896,98.933 h1.27
P55: Top Overlay "10" at 91.567,41.402 h1.27; Top Overlay "9" at 91.567,38.862 h1.27; Top Overlay "1" at 77.851,38.862 h1.27; Top Overlay "2" at 77.343,41.402 h1.27
P57: Top Overlay "2" at 162.306,3.81 h1.27; Top Overlay "1" at 162.814,1.27 h1.27; Top Overlay "9" at 176.53,1.27 h1.27; Top Overlay "10" at 176.53,3.81 h1.27
P59: Top Overlay "2" at 153.289,10.16 h1.27 r180; Top Overlay "1" at 152.781,12.7 h1.27 r180; Top Overlay "9" at 139.065,12.7 h1.27 r180; Top Overlay "10" at 139.065,10.16 h1.27 r180
P61: Top Overlay "2" at 162.433,49.784 h1.27; Top Overlay "1" at 162.941,47.244 h1.27; Top Overlay "9" at 176.657,47.244 h1.27; Top Overlay "10" at 176.657,49.784 h1.27
P63: Top Overlay "2" at 94.615,18.796 h1.27 r180; Top Overlay "1" at 94.107,21.336 h1.27 r180; Top Overlay "9" at 80.391,21.336 h1.27 r180; Top Overlay "10" at 80.391,18.796 h1.27 r180
U6: Top Overlay "1" at 145.304,121.916 h1.5 r270; Top Overlay "2" at 145.304,119.626 h1.5 r270; Top Overlay "3" at 145.304,117.086 h1.5 r270
U24: Top Overlay "1" at 27.047,16.494 h1.5 r180; Top Overlay "2" at 24.757,16.494 h1.5 r180; Top Overlay "3" at 22.217,16.494 h1.5 r180
U25: Top Overlay "3" at 23.663,22.741 h1.5 r90; Top Overlay "1" at 26.109,22.741 h1.5 r90